# EAGLE board CT_schematic (EAGLE 7.6.0)

Size 100 x 80 mm. Coordinates in mm from the lower left corner, seen from the top.
Outline: 0,0 100,0 100,80 0,80 0,0
Copper layers (1*16): Top 0.035mm / dielectric 1.5mm / Bottom 0.035mm
Design rules "default": minimum track width 10mil, minimum drill 24mil, track to track 8mil, track to pad 8mil, pad to pad 8mil, via to via 8mil, smd to smd 8mil, copper to edge 40mil, drill to drill 8mil, minimum pad ring 10mil, minimum via ring 8mil, stop-mask expansion 4mil, vias tented up to drill 0mil, thermal gap 10mil

## Footprints (pad centres in the part's own frame; a part is rotated, then mirrored left to right if it is on the bottom)
C0603 = smd 0.8 x 0.8: 1 -0.762,0; 2 0.762,0
C0402 = smd 0.5 x 0.5: 1 -0.508,0; 2 0.508,0
C1210 = smd 1.2 x 2.5: 1 -1.524,0; 2 1.524,0
C0805 = smd 1.2 x 1.3: 1 -1.016,0; 2 1.016,0
C1206 = smd 1.3 x 1.6: 1 -1.524,0; 2 1.524,0
EXV-9H = smd 3.505 x 1.676: 1 -2.857,0; 2 2.857,0
L1210 = smd 1.2 x 2.5: 1 -1.524,0; 2 1.524,0
PJ-037B_PACKAGE = drill 3.7 square: 1 12,0 | drill 3.2 square: 2 6,0
R0603 = smd 0.8 x 0.8: 1 -0.762,0; 2 0.762,0
UFQFPN48 = smd 0.559 x 0.305: 1 -3.375,2.751; 2 -3.375,2.251; 3 -3.375,1.75; 4 -3.375,1.25; 5 -3.375,0.75; 6 -3.375,0.25; 7 -3.375,-0.25; 8 -3.375,-0.75; 9 -3.375,-1.25; 10 -3.375,-1.75; 11 -3.375,-2.251; 12 -3.375,-2.751; 25 3.375,-2.751; 26 3.375,-2.251; 27 3.375,-1.75; 28 3.375,-1.25; 29 3.375,-0.75; 30 3.375,-0.25; 31 3.375,0.25; 32 3.375,0.75; 33 3.375,1.25; 34 3.375,1.75; 35 3.375,2.251; 36 3.375,2.751 | smd 0.305 x 0.559: 13 -2.751,-3.375; 14 -2.251,-3.375; 15 -1.75,-3.375; 16 -1.25,-3.375; 17 -0.75,-3.375; 18 -0.25,-3.375; 19 0.25,-3.375; 20 0.75,-3.375; 21 1.25,-3.375; 22 1.75,-3.375; 23 2.251,-3.375; 24 2.751,-3.375; 37 2.751,3.375; 38 2.251,3.375; 39 1.75,3.375; 40 1.25,3.375; 41 0.75,3.375; 42 0.25,3.375; 43 -0.25,3.375; 44 -0.75,3.375; 45 -1.25,3.375; 46 -1.75,3.375; 47 -2.251,3.375; 48 -2.751,3.375 | smd 5.588 x 5.588: 49 0,0
LGA63S127P16X13_2050X1750X150 = smd 0.9 x 0.9: 1 -9.525,-8.05; 2 -8.255,-8.05; 3 -6.985,-8.05; 4 -5.715,-8.05; 5 -4.445,-8.05; 6 -3.175,-8.05; 7 -1.905,-8.05; 8 -0.635,-8.05; 9 0.635,-8.05; 10 1.905,-8.05; 11 3.175,-8.05; 12 4.445,-8.05; 13 5.715,-8.05; 14 6.985,-8.05; 15 8.255,-8.05; 16 9.525,-8.05; 17 9.525,-6.35; 18 9.525,-5.08; 19 9.525,-3.81; 20 9.525,-2.54; 21 9.525,-1.27; 22 9.525,0; 23 9.525,1.27; 24 9.525,2.54; 25 9.525,3.81; 26 9.525,5.08; 27 9.525,6.35; 28 9.525,8.05; 29 8.255,8.05; 30 6.985,8.05; 31 5.715,8.05; 32 4.445,8.05; 33 3.175,8.05; 34 1.905,8.05; 35 0.635,8.05; 36 -0.635,8.05; 37 -1.905,8.05; 38 -3.175,8.05; 39 -4.445,8.05; 40 -5.715,8.05; 41 -6.985,8.05; 42 -8.255,8.05; 43 -9.525,8.05; 44 -9.525,6.35; 45 -9.525,5.08; 46 -9.525,3.81; 47 -9.525,2.54; 48 -9.525,1.27; 49 -9.525,0; 50 -9.525,-1.27; 51 -9.525,-2.54; 52 -9.525,-3.81; 53 -9.525,-5.08; 54 -9.525,-6.35 | smd 2.2 x 2.2: 55 -4.5,-4.5; 56 -1.5,-4.5; 57 1.5,-4.5; 58 -4.5,-1.5; 59 -1.5,-1.5; 60 1.5,-1.5; 61 -4.5,1.5; 62 -1.5,1.5; 63 1.5,1.5
COAXIAL_C = smd 1 x 1: 1 0,-1.5; 2 0,1.5 | smd 1.05 x 2.2: 3 -1.475,0; 4 1.475,0
SAMTEC_FTSH-105-01-L-DV-K = smd 0.762 x 2.794: 1 -2.54,-2.032; 2 -2.54,2.032; 3 -1.27,-2.032; 4 -1.27,2.032; 5 0,-2.032; 6 0,2.032; 7 1.27,-2.032; 8 1.27,2.032; 9 2.54,-2.032; 10 2.54,2.032
SSOP-20 = smd 1.651 x 0.432: 1 -3.48,2.925; 2 -3.48,2.275; 3 -3.48,1.625; 4 -3.48,0.975; 5 -3.48,0.325; 6 -3.48,-0.325; 7 -3.48,-0.975; 8 -3.48,-1.625; 9 -3.48,-2.275; 10 -3.48,-2.925; 11 3.48,-2.925; 12 3.48,-2.275; 13 3.48,-1.625; 14 3.48,-0.975; 15 3.48,-0.325; 16 3.48,0.325; 17 3.48,0.975; 18 3.48,1.625; 19 3.48,2.275; 20 3.48,2.925
HTSS-105-01-G-D = drill 1 pad 1.8 square: 1 0,0 | drill 1 pad 1.8: 2 0,2.54; 3 2.54,0; 4 2.54,2.54; 5 5.08,0; 6 5.08,2.54; 7 7.62,0; 8 7.62,2.54; 9 10.16,0; 10 10.16,2.54
SI7034-A10-IM = smd 0.75 x 0.4: 1 -1,0.5; 2 -1,-0.5; 4 1,-0.5; 5 1,0.5 | smd 0.8 x 1.7: 3 0,0
WFDN-8 = smd 0.48 x 0.7: 1 0,0; 2 1.27,0; 3 2.54,0; 4 3.81,0; 5 3.81,4.45; 6 2.54,4.45; 7 1.27,4.45; 8 0,4.45 | smd 4 x 3: 9 1.89,2.25
ASEK = smd 1.4 x 1: 1 -1.1,-0.8; 2 1.1,-0.8; 3 1.1,0.8; 4 -1.1,0.8
ASFL1 = smd 1.7 x 1.5: 1 -1.27,-1.1; 2 1.27,-1.1; 3 1.27,1.1; 4 -1.27,1.1
WSON-8 = smd 0.3 x 0.6: 1 -0.75,0; 2 0.05,0; 3 0.85,0; 4 1.65,0; 5 1.65,3.8; 6 0.85,3.8; 7 0.05,3.8; 8 -0.75,3.8 | smd 3 x 2.6: PAD 0.45,1.9
SON-6 = smd 0.55 x 0.3: 1 -0.355,0.5 | smd 0.52 x 0.3: 2 -0.37,0; 3 -0.37,-0.5; 4 0.37,-0.5; 5 0.37,0; 6 0.37,0.5
DCU0008A_N = smd 0.5 x 0.3: 1 -1.6,0.75; 2 -1.6,0.25; 3 -1.6,-0.25; 4 -1.6,-0.75; 5 1.6,-0.75; 6 1.6,-0.25; 7 1.6,0.25; 8 1.6,0.75
PW0020A = smd 1.35 x 0.35: 1 -2.85,2.925; 2 -2.85,2.275; 3 -2.85,1.625; 4 -2.85,0.975; 5 -2.85,0.325; 6 -2.85,-0.325; 7 -2.85,-0.975; 8 -2.85,-1.625; 9 -2.85,-2.275; 10 -2.85,-2.925; 11 2.85,-2.925; 12 2.85,-2.275; 13 2.85,-1.625; 14 2.85,-0.975; 15 2.85,-0.325; 16 2.85,0.325; 17 2.85,0.975; 18 2.85,1.625; 19 2.85,2.275; 20 2.85,2.925
SW_4-1437565-2 = smd 1.4 x 2.1: 1 -2.23,4.55; 2 -2.23,-4.55; 3 2.23,4.55; 4 2.23,-4.55
LGM67K-G1J2-24-Z = smd 0.8 x 1.4: A -2,0; C 0,0
NC7SZ125M5X = smd 1.3 x 0.7: 1 -1.3,0.95; 2 -1.3,0; 3 -1.3,-0.95; 4 1.3,-0.95; 5 1.3,0.95

## Placement (x,y rotation side)
C1  1e-06  [C0603]  -78.74,71.12 0 top  (outside the outline)
C2  1e-07  [C0603]  -15.24,76.2 0 top  (outside the outline)
C3  1e-07  [C0603]  -19.05,76.2 0 top  (outside the outline)
C4  1e-07  [C0603]  -22.86,76.2 0 top  (outside the outline)
C5  1e-07  [C0603]  -26.67,76.2 0 top  (outside the outline)
C6  1e-07  [C0603]  -30.48,76.2 0 top  (outside the outline)
C7  4.7e-06  [C0603]  -74.93,71.12 0 top  (outside the outline)
C8  1e-08  [C0603]  -34.29,76.2 0 top  (outside the outline)
C9  1e-06  [C0603]  -38.1,76.2 0 top  (outside the outline)
C10  1e-07  [C0603]  -41.91,76.2 0 top  (outside the outline)
C11  1e-12  [C0402]  -43.18,81.28 0 top  (outside the outline)
C12  2.2e-05  [C1210]  -39.37,58.42 0 top  (outside the outline)
C13  1e-07  [C0402]  -46.99,81.28 0 top  (outside the outline)
C14  1e-07  [C0402]  -50.8,81.28 0 top  (outside the outline)
C15  1e-07  [C0402]  -54.61,81.28 0 top  (outside the outline)
C16  1e-06  [C0603]  -45.72,76.2 0 top  (outside the outline)
C17  1e-06  [C0603]  -49.53,76.2 0 top  (outside the outline)
C18  1e-06  [C0603]  -53.34,76.2 0 top  (outside the outline)
C19  4.7e-06  [C0805]  -15.24,66.04 0 top  (outside the outline)
C20  1e-07  [C0402]  -58.42,81.28 0 top  (outside the outline)
C21  1e-07  [C0402]  -62.23,81.28 0 top  (outside the outline)
C22  1e-08  [C0402]  -66.04,81.28 0 top  (outside the outline)
C23  1e-08  [C0402]  -69.85,81.28 0 top  (outside the outline)
C24  1e-08  [C0402]  -73.66,81.28 0 top  (outside the outline)
C25  1e-05  [C1206]  -58.42,58.42 0 top  (outside the outline)
C26  1e-05  [C0805]  -20.32,66.04 0 top  (outside the outline)
C27  1e-06  [C0603]  -57.15,76.2 0 top  (outside the outline)
C28  1e-05  [C1210]  -45.72,58.42 0 top  (outside the outline)
C29  1e-07  [C0402]  -77.47,81.28 0 top  (outside the outline)
C30  0.0001  [EXV-9H]  -77.47,50.8 0 top  (outside the outline)
C31  0.0001  [EXV-9H]  -17.78,59.69 0 top  (outside the outline)
C32  1e-08  [C0402]  -81.28,81.28 0 top  (outside the outline)
C33  1e-07  [C0402]  -15.24,86.36 0 top  (outside the outline)
C34  1e-08  [C0402]  -19.05,86.36 0 top  (outside the outline)
C35  1e-07  [C0402]  -22.86,86.36 0 top  (outside the outline)
C36  1e-08  [C0402]  -26.67,86.36 0 top  (outside the outline)
C37  1e-07  [C0402]  -30.48,86.36 0 top  (outside the outline)
C38  1e-08  [C0402]  -34.29,86.36 0 top  (outside the outline)
C39  1e-07  [C0402]  -38.1,86.36 0 top  (outside the outline)
C40  1e-08  [C0402]  -41.91,86.36 0 top  (outside the outline)
C41  1e-08  [C0402]  -45.72,86.36 0 top  (outside the outline)
C42  1e-08  [C0402]  -49.53,86.36 0 top  (outside the outline)
I1  3.6e-09  [C0402]  -39.37,81.28 0 top  (outside the outline)
I2  1.5e-05  [L1210]  -52.07,58.42 0 top  (outside the outline)
J1  PJ-037B  [PJ-037B_PACKAGE]  -27.94,29.21 0 top  (outside the outline)
R1  10000.0  [R0603]  -30.48,71.12 0 top  (outside the outline)
R2  1000.0  [R0603]  -60.96,76.2 0 top  (outside the outline)
R3  910.0  [R0603]  -64.77,76.2 0 top  (outside the outline)
R4  4700.0  [R0603]  -68.58,76.2 0 top  (outside the outline)
R5  4700.0  [R0603]  -72.39,76.2 0 top  (outside the outline)
R6  2200.0  [R0603]  -76.2,76.2 0 top  (outside the outline)
R7  2200.0  [R0603]  -80.01,76.2 0 top  (outside the outline)
R8  2200.0  [R0603]  -15.24,81.28 0 top  (outside the outline)
R9  2200.0  [R0603]  -19.05,81.28 0 top  (outside the outline)
R10  10000.0  [R0603]  -35.56,71.12 0 top  (outside the outline)
R11  100000.0  [R0603]  -30.48,66.04 0 top  (outside the outline)
R12  2700.0  [R0603]  -22.86,81.28 0 top  (outside the outline)
R13  10000.0  [R0603]  -40.64,71.12 0 top  (outside the outline)
R14  10000.0  [R0603]  -45.72,71.12 0 top  (outside the outline)
R15  10000.0  [R0603]  -50.8,71.12 0 top  (outside the outline)
R16  10000.0  [R0603]  -55.88,71.12 0 top  (outside the outline)
R17  5.0  [R0603]  -26.67,81.28 0 top  (outside the outline)
R18  100000.0  [R0603]  -35.56,66.04 0 top  (outside the outline)
R19  100000.0  [R0603]  -40.64,66.04 0 top  (outside the outline)
R20  100000.0  [R0603]  -45.72,66.04 0 top  (outside the outline)
R21  100000.0  [R0603]  -50.8,66.04 0 top  (outside the outline)
R22  100000.0  [R0603]  -55.88,66.04 0 top  (outside the outline)
R23  100000.0  [R0603]  -60.96,66.04 0 top  (outside the outline)
R24  100000.0  [R0603]  -66.04,66.04 0 top  (outside the outline)
R25  806.0  [R0603]  -30.48,81.28 0 top  (outside the outline)
R26  1000.0  [R0603]  -34.29,81.28 0 top  (outside the outline)
R27  100000.0  [R0603]  -71.12,66.04 0 top  (outside the outline)
R28  153694.38  [R0603]  -25.4,66.04 0 top  (outside the outline)
R29  100000.0  [R0603]  -76.2,66.04 0 top  (outside the outline)
R30  10000.0  [R0603]  -60.96,71.12 0 top  (outside the outline)
R31  10000.0  [R0603]  -66.04,71.12 0 top  (outside the outline)
R32  82000.0  [R0603]  -71.12,71.12 0 top  (outside the outline)
R33  300000.0  [R0603]  -81.28,66.04 0 top  (outside the outline)
R34  120000.0  [R0603]  -15.24,71.12 0 top  (outside the outline)
R35  200000.0  [R0603]  -20.32,71.12 0 top  (outside the outline)
R36  200000.0  [R0603]  -25.4,71.12 0 top  (outside the outline)
U1  STM32L433CCU6  [UFQFPN48]  -17.78,50.8 0 top  (outside the outline)
U2  CC3200MODR1M2AMOBT  [LGA63S127P16X13_2050X1750X150]  -25.4,11.43 0 top  (outside the outline)
U3  73412-0114  [COAXIAL_C]  -48.26,50.8 0 top  (outside the outline)
U4  FTSH-105-01-L-DV-K  [SAMTEC_FTSH-105-01-L-DV-K]  -60.96,7.62 0 top  (outside the outline)
U5  MAX3218EAP+T  [SSOP-20]  -36.83,40.64 0 top  (outside the outline)
U6  HTSS-105-01-G-D  [HTSS-105-01-G-D]  -27.94,40.64 0 top  (outside the outline)
U7  Si7034-A10-IM  [SI7034-A10-IM]  -68.58,85.09 0 top  (outside the outline)
U8  SST26VF032B-104I/MF  [WFDN-8]  -74.93,26.67 0 top  (outside the outline)
U9  ASEK-32.768KHz-ECST  [ASEK]  -68.58,50.8 0 top  (outside the outline)
U10  ASFL1-25MHZ-NCS  [ASFL1]  -36.83,50.8 0 top  (outside the outline)
U11  LP3878SDX-ADJ/NOPB  [WSON-8]  -59.69,39.37 0 top  (outside the outline)
U12  LP2951ACSDX/NOPB  [WSON-8]  -77.47,39.37 0 top  (outside the outline)
U13  TPS3895ADRYR  [SON-6]  -72.39,85.09 0 top  (outside the outline)
U14  LSF0102DCTR  [DCU0008A_N]  -62.23,85.09 0 top  (outside the outline)
U15  LSF0108PWR  [PW0020A]  -33.02,31.75 0 top  (outside the outline)
U16  4-1437565-2  [SW_4-1437565-2]  -52.07,29.21 0 top  (outside the outline)
U17  Q65110A2395  [LGM67K-G1J2-24-Z]  -27.94,58.42 0 top  (outside the outline)
U18  nc7sz125m5x  [NC7SZ125M5X]  -63.5,57.15 0 top  (outside the outline)
U19  nc7sz125m5x  [NC7SZ125M5X]  -69.85,57.15 0 top  (outside the outline)
U20  nc7sz125m5x  [NC7SZ125M5X]  -76.2,57.15 0 top  (outside the outline)

## Library data of the parts
C1-C42 I1 I2 J1 R1-R36 U1-U20 = circuit_tree

## Nets
CLK_U1_3: U1.3 U9.3
CLK_U1_5: U1.5 U10.3
GND: C1.2 C2.2 C3.2 C4.2 C5.2 C6.2 C7.2 C8.2 C9.2 C10.2 C11.2 C12.2 C13.2 C14.2 C15.2 C16.2 C17.2 C18.2 C20.2 C21.2 C22.2 C23.2 C24.2 C25.2 C26.2 C27.2 C28.2 C29.2 C30.2 C31.2 C32.2 C33.2 C34.2 C35.2 C36.2 C37.2 C38.2 C39.2 C40.2 C41.2 C42.2 J1.2 R2.2 R10.2 R11.2 R12.2 R16.2 R17.2 R26.2 R29.2 R32.2 R34.2 U1.8 U1.23 U1.35 U1.47 U1.49 U2.1 U2.2 U2.16 U2.27 U2.28 U2.30 U2.32 U2.38 U2.43 U2.55 U2.56 U2.57 U2.58 U2.59 U2.60 U2.61 U2.62 U2.63 U3.1 U3.2 U3.3 U3.4 U4.3 U4.5 U5.5 U5.17 U5.20 U6.9 U7.5 U8.4 U8.9 U9.2 U10.2 U11.3 U11.PAD U12.3 U12.4 U12.PAD U13.2 U14.1 U15.1 U17.C U18.2 U18.3 U19.1 U19.3 U20.1 U20.3
NET_U1_7: R5.1 U1.7 U20.4
NET_U1_21: R8.1 U1.21 U7.2
NET_U1_22: R9.1 U1.22 U7.4
NET_U1_31: R7.1 U1.31 U14.3
NET_U1_42: R6.1 U1.42 U14.4
NET_U1_44: R10.1 U1.44
NET_U1_45: R3.1 U1.45 U17.A
NET_U1_46: R1.1 U1.46 U16.3 U16.4
NET_U2_21: R11.1 U2.21
NET_U2_23: R12.1 U2.23
NET_U2_35: R4.1 U2.35 U19.4
NET_U3_1: C11.1 I1.1 U3.1
NET_U3_31: I1.2
NET_U4_9: R17.1 U4.9
NET_U5_1: I2.1 U5.1
NET_U5_2: R18.1 U5.2
NET_U5_3: R19.1 U5.3
NET_U5_4: R20.1 U5.4
NET_U5_15: C18.1 U5.15
NET_U5_16: C19.2 U5.16
NET_U5_18: C19.1 U5.18
NET_U5_19: C17.1 U5.19
NET_U6_3: U5.12 U6.3
NET_U6_4: U5.11 U6.4
NET_U6_5: U5.14 U6.5
NET_U6_6: U5.13 U6.6
NET_U11_1: C24.1 U11.1
NET_U11_6: R25.2 R26.1 U11.6
NET_U11_8: R24.1 U11.8
NET_U12_5: R27.1 U12.5
NET_U12_7: R28.2 R29.1 U12.7
NET_U13_1: R31.1 R32.1 U13.1
NET_U13_3: R33.2 R34.1 U13.3
NET_U13_4: R30.1 U13.4 U18.4 U19.2 U20.2
NET_U14_8: R35.1 U14.8
NET_U15_20: R36.1 U15.20
NET_U16_1: R2.1 U16.1 U16.2
PROC_I2C1_SCL_TOXCVR: U2.3 U14.5
PROC_I2C1_SDA_TOXCVR: U2.4 U14.6
PROC_QUADSPI_BK1_IO0_TOIOBUF: U1.19 U15.3
PROC_QUADSPI_BK1_IO0_TOXCVR: U8.5 U15.18
PROC_QUADSPI_BK1_IO1_TOIOBUF: U1.18 U15.7
PROC_QUADSPI_BK1_IO1_TOXCVR: U8.2 U15.14
PROC_QUADSPI_BK1_IO2_TOIOBUF: U1.17 U15.5
PROC_QUADSPI_BK1_IO2_TOXCVR: R22.1 U8.3 U15.16
PROC_QUADSPI_BK1_IO3_TOIOBUF: U1.16 U15.8
PROC_QUADSPI_BK1_IO3_TOXCVR: R23.1 U8.7 U15.13
PROC_QUADSPI_BK1_NCS_TOIOBUF: U1.12 U15.6
PROC_QUADSPI_BK1_NCS_TOXCVR: R21.1 U8.1 U15.15
PROC_QUADSPI_CLK_TOIOBUF: U1.13 U15.4
PROC_QUADSPI_CLK_TOXCVR: U8.6 U15.17
PROC_SYS_JTCK_SWCLK: R16.1 U1.37 U4.4
PROC_SYS_JTDI: R14.1 U1.38 U4.8
PROC_SYS_JTDO_SWO: U1.39 U4.6
PROC_SYS_JTMS_SWDIO: R15.1 U1.34 U4.2
PROC_USART1_CTS: U1.32 U5.8
PROC_USART1_RTS: U1.33 U5.10
PROC_USART1_RX: U1.43 U5.9
PROC_USART1_TX: U1.30 U5.7
RST_OUT_U4_JTAG_RST_B: R13.1 U4.10 U18.1
VCC_S1_7V4: C25.1 C27.1 C30.1 C31.1 J1.1 R24.2 U11.4 U12.8
VCC_TIER1_1V8: C1.1 C2.1 C3.1 C4.1 C5.1 C6.1 C7.1 C10.1 C15.1 C16.1 C20.1 C26.1 C29.1 C34.1 C35.1 C38.1 C39.1 C40.1 C41.1 C42.1 I2.2 R1.2 R3.2 R5.2 R6.2 R7.2 R8.2 R9.2 R13.2 R14.2 R15.2 R18.2 R19.2 R20.2 R25.1 R30.2 R31.2 R33.1 U1.1 U1.24 U1.36 U1.48 U4.1 U5.6 U7.1 U11.5 U13.6 U14.2 U15.2 U18.5 U19.5 U20.5
VCC_TIER1_3V3: C8.1 C9.1 C12.1 C13.1 C14.1 C21.1 C22.1 C23.1 C28.1 C32.1 C33.1 C36.1 C37.1 R4.2 R21.2 R22.2 R23.2 R27.2 R28.1 R35.2 R36.2 U1.9 U2.36 U2.37 U2.40 U8.8 U9.4 U10.4 U12.1 U14.7 U15.19

## Tracks (layer width: path | path; a pad name or v marks a point on that pad's centre or on a via)
CLK_U1_3  (1 unrouted)
CLK_U1_5  (1 unrouted)
GND  (104 unrouted)
NET_U1_7  (2 unrouted)
NET_U1_21  (2 unrouted)
NET_U1_22  (2 unrouted)
NET_U1_31  (2 unrouted)
NET_U1_42  (2 unrouted)
NET_U1_44  (1 unrouted)
NET_U1_45  (2 unrouted)
NET_U1_46  (3 unrouted)
NET_U2_21  (1 unrouted)
NET_U2_23  (1 unrouted)
NET_U2_35  (2 unrouted)
NET_U3_1  (2 unrouted)
NET_U4_9  (1 unrouted)
NET_U5_1  (1 unrouted)
NET_U5_2  (1 unrouted)
NET_U5_3  (1 unrouted)
NET_U5_4  (1 unrouted)
NET_U5_15  (1 unrouted)
NET_U5_16  (1 unrouted)
NET_U5_18  (1 unrouted)
NET_U5_19  (1 unrouted)
NET_U6_3  (1 unrouted)
NET_U6_4  (1 unrouted)
NET_U6_5  (1 unrouted)
NET_U6_6  (1 unrouted)
NET_U11_1  (1 unrouted)
NET_U11_6  (2 unrouted)
NET_U11_8  (1 unrouted)
NET_U12_5  (1 unrouted)
NET_U12_7  (2 unrouted)
NET_U13_1  (2 unrouted)
NET_U13_3  (2 unrouted)
NET_U13_4  (4 unrouted)
NET_U14_8  (1 unrouted)
NET_U15_20  (1 unrouted)
NET_U16_1  (2 unrouted)
PROC_I2C1_SCL_TOXCVR  (1 unrouted)
PROC_I2C1_SDA_TOXCVR  (1 unrouted)
PROC_QUADSPI_BK1_IO0_TOIOBUF  (1 unrouted)
PROC_QUADSPI_BK1_IO0_TOXCVR  (1 unrouted)
PROC_QUADSPI_BK1_IO1_TOIOBUF  (1 unrouted)
PROC_QUADSPI_BK1_IO1_TOXCVR  (1 unrouted)
PROC_QUADSPI_BK1_IO2_TOIOBUF  (1 unrouted)
PROC_QUADSPI_BK1_IO2_TOXCVR  (2 unrouted)
PROC_QUADSPI_BK1_IO3_TOIOBUF  (1 unrouted)
PROC_QUADSPI_BK1_IO3_TOXCVR  (2 unrouted)
PROC_QUADSPI_BK1_NCS_TOIOBUF  (1 unrouted)
PROC_QUADSPI_BK1_NCS_TOXCVR  (2 unrouted)
PROC_QUADSPI_CLK_TOIOBUF  (1 unrouted)
PROC_QUADSPI_CLK_TOXCVR  (1 unrouted)
PROC_SYS_JTCK_SWCLK  (2 unrouted)
PROC_SYS_JTDI  (2 unrouted)
PROC_SYS_JTDO_SWO  (1 unrouted)
PROC_SYS_JTMS_SWDIO  (2 unrouted)
PROC_USART1_CTS  (1 unrouted)
PROC_USART1_RTS  (1 unrouted)
PROC_USART1_RX  (1 unrouted)
PROC_USART1_TX  (1 unrouted)
RST_OUT_U4_JTAG_RST_B  (2 unrouted)
VCC_S1_7V4  (7 unrouted)
VCC_TIER1_1V8  (51 unrouted)
VCC_TIER1_3V3  (30 unrouted)